# EAGLE board atat_switch_v02 (EAGLE 7.5.0)
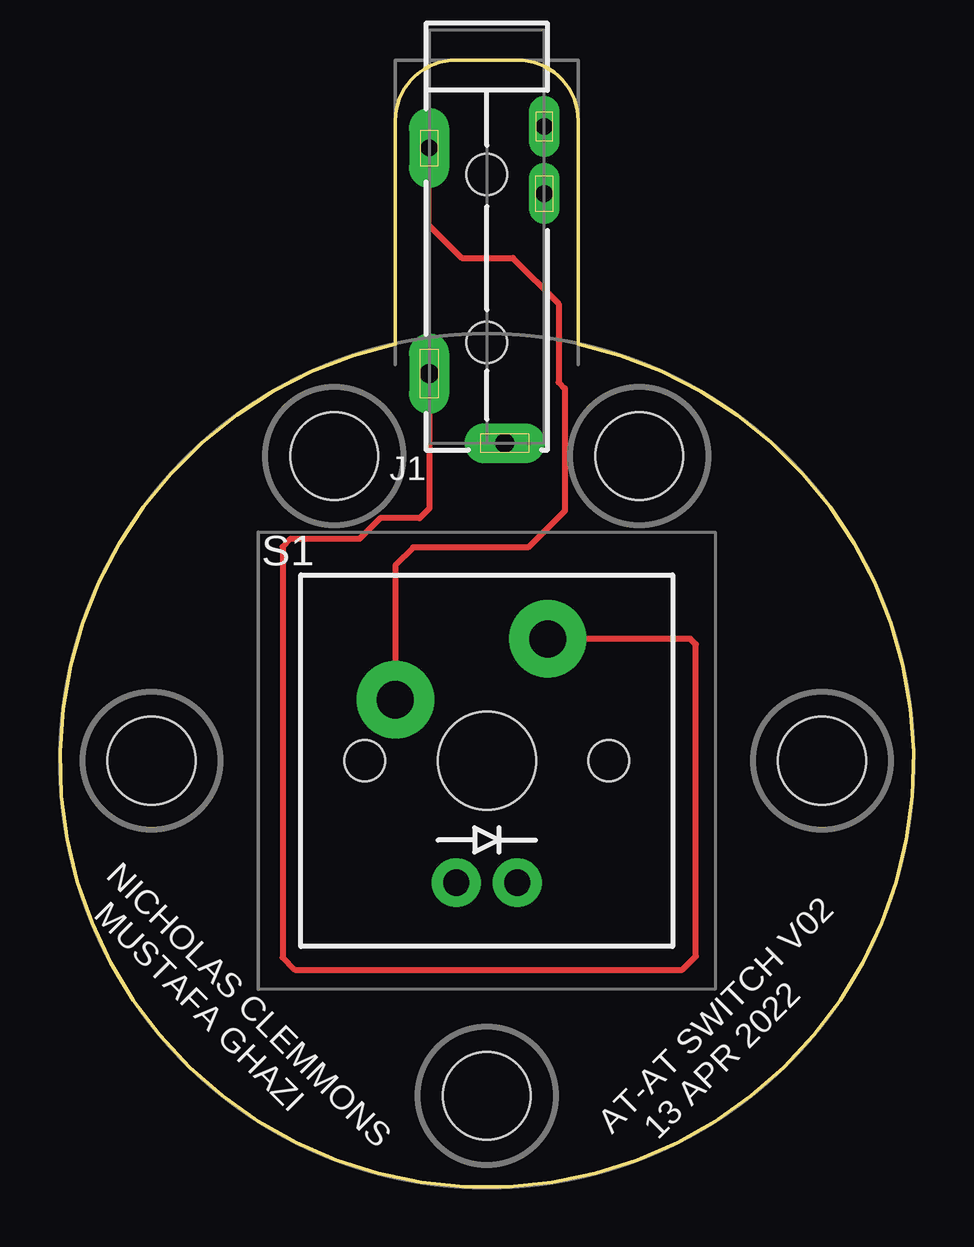
[diagram p0: board, top side]
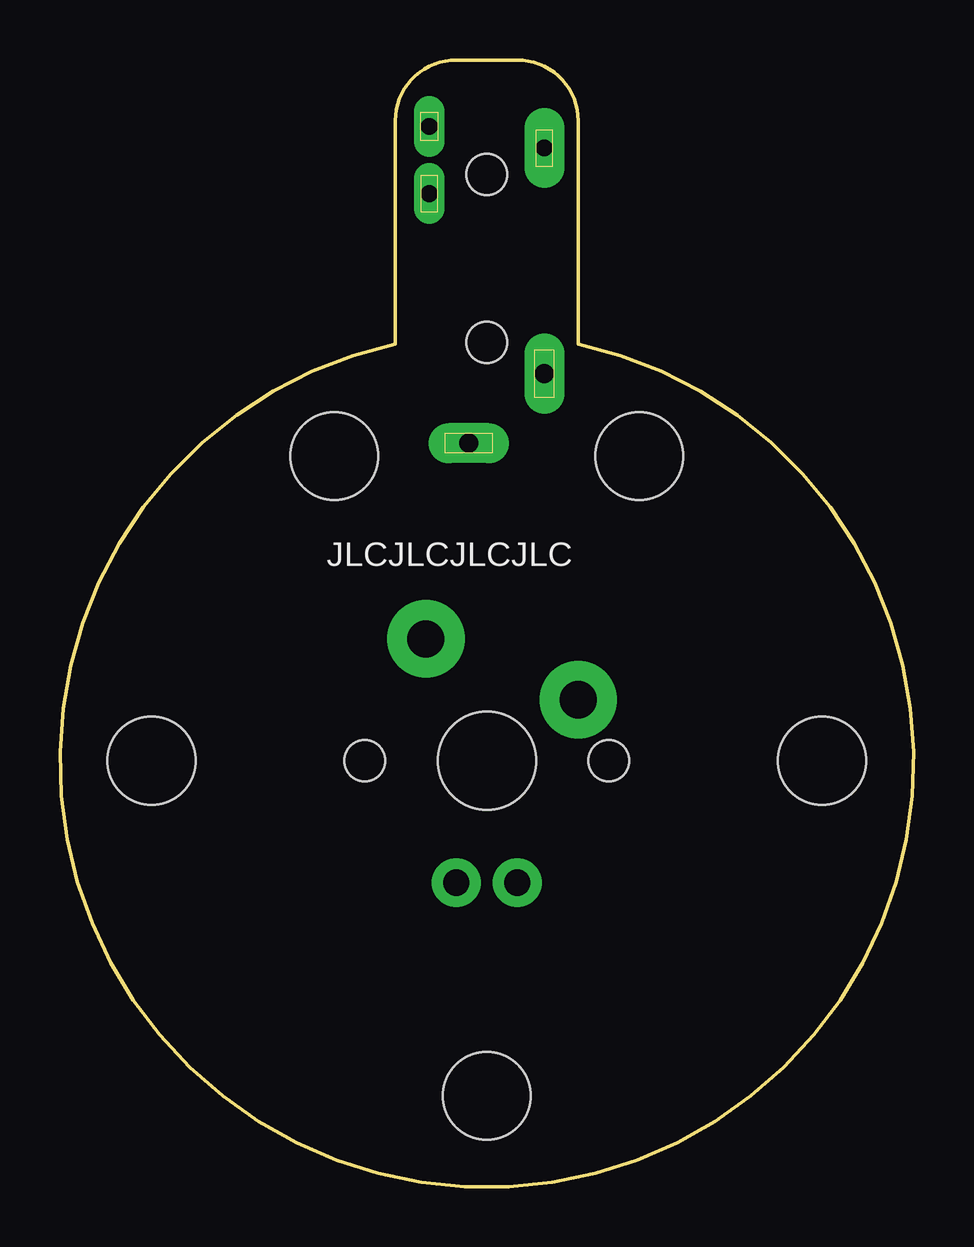
[diagram p1: board, bottom side, seen from below]

Size 35.57 x 46.97 mm. Coordinates in mm from the lower left corner, seen from the top.
Outline: 21.59,35.14 arc-335 13.97,35.14 13.97,44.43 arc-90 16.51,46.97 19.05,46.97 arc-90 21.59,44.43 21.59,35.14
Copper layers (1*16): Top 0.0356mm / dielectric 1.5011mm / Bottom 0.0356mm
Design rules "oshpark-2layer *": minimum track width 6mil, minimum drill 13mil, track to track 6mil, track to pad 6mil, pad to pad 6mil, via to via 6mil, smd to smd 6mil, copper to edge 15mil, drill to drill 6mil, minimum pad ring 7mil, minimum via ring 7mil, stop-mask expansion 2.5mil, vias tented up to drill 22mil, thermal gap 10mil
Holes 3.66 mm at 3.81,17.76 31.75,17.76 17.78,3.79 24.13,30.46 11.43,30.46

## Footprints (pad centres in the part's own frame; a part is rotated, then mirrored left to right if it is on the bottom)
PJ-328A0-B-V02 = drill 0.7 pad 1.676 long: 1 2.4,2.4 | drill 0.8 pad 1.676 long: 2 2.4,11.8; 10 -0.75,14.7 | drill 0.7 pad 1.27 long: 3 -2.4,4.3; 11 -2.4,1.5 | hole 1.7: 0,3.5; 0,10.5
CHERRY-MX-YES-PINS-LED-SILK-V01 = drill 1.549 pad 3.226: 1 -3.81,2.54; 2 2.54,5.08 | drill 1.092 pad 2.032: 3 -1.27,-5.08; 4 1.27,-5.08 | hole 4.089: 0,0 | hole 1.702: 5.08,0; -5.08,0

## Placement (x,y rotation side)
J1  [PJ-328A0-B-V02]  17.78,45.7 180 top
S1  [CHERRY-MX-YES-PINS-LED-SILK-V01]  17.78,17.76 0 top

## Library data of the parts
J1 S1 = crawler_components

## Nets
S$1: J1.2 S1.2
S$2: J1.1 S1.1

## Tracks (layer width: path | path; a pad name or v marks a point on that pad's centre or on a via)
S$1
  Top 0.254: J1.2 15.39,33.89 15.39,28.28 14.99,27.87 13.34,27.87 12.47,27.01 9.6,27.01 9.27,26.68 9.27,9.56 9.78,9.05 25.94,9.05 26.49,9.61 26.49,22.61 26.27,22.84 S1.2
S$2
  Top 0.254: J1.1 arc90 15.34,43.27 15.34,40.12 16.74,38.72 18.87,38.72 20.78,36.81 20.78,33.54 21.03,33.28 21.03,28.18 19.51,26.65 14.71,26.65 13.97,25.92 S1.1

## Text on the board
tPlace: NICHOLAS CLEMMONS / MUSTAFA GHAZI | AT-AT SWITCH V02 / 13 APR 2022
bPlace: JLCJLCJLCJLC
tDocu: 850, 1684 | 1150,1684 | dia about 1.23 / Motherboads 6-32 (0.1440 in) or / M3 (3.15 mm, 0.1240 in) / Using Hole size 0.1440 in